# Altium PCB GM802测试板.PcbDoc
Units mil, origin at the board's own origin, x right, y up, seen from the top; angles counter-clockwise.
Board outline 1124 x 2005 mil, 2 copper layers (Top Layer, Bottom Layer); 29 components, 39 nets, 210 pads, 99 vias.
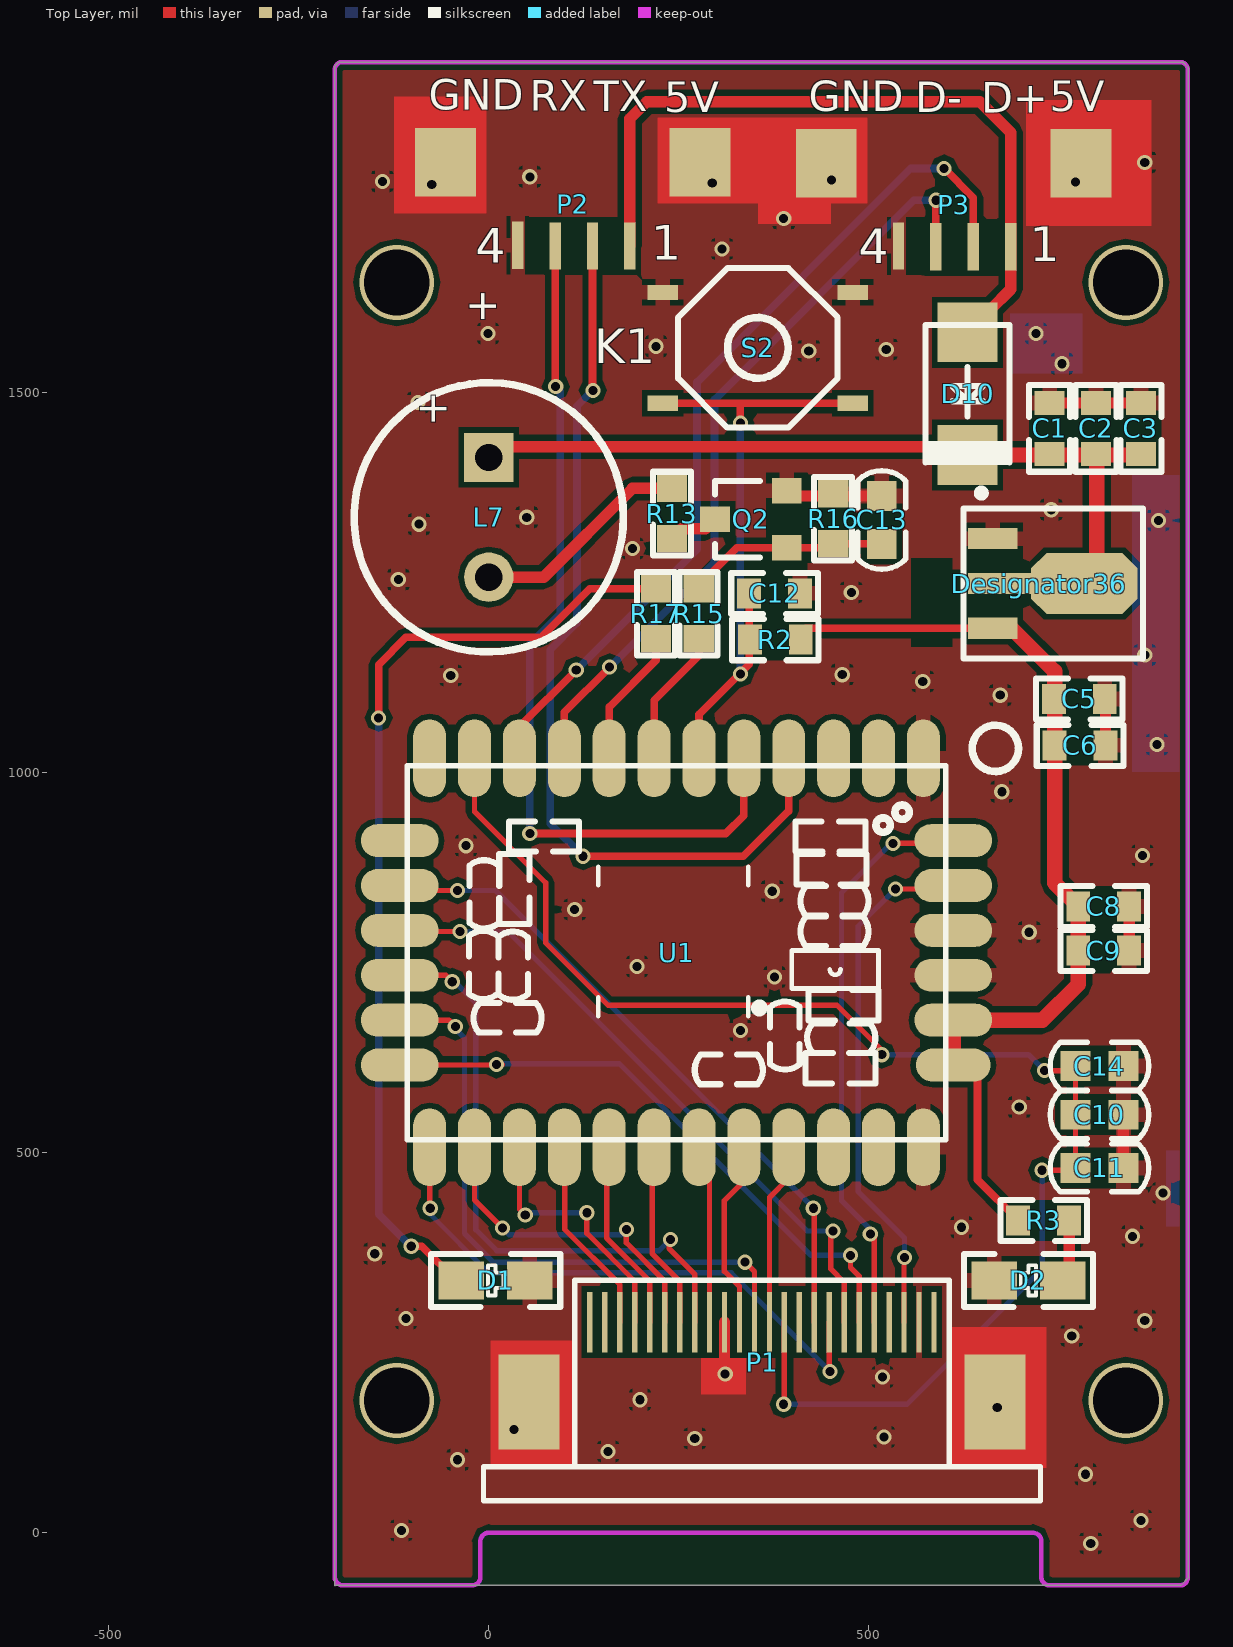
[diagram p0: Top Layer view]
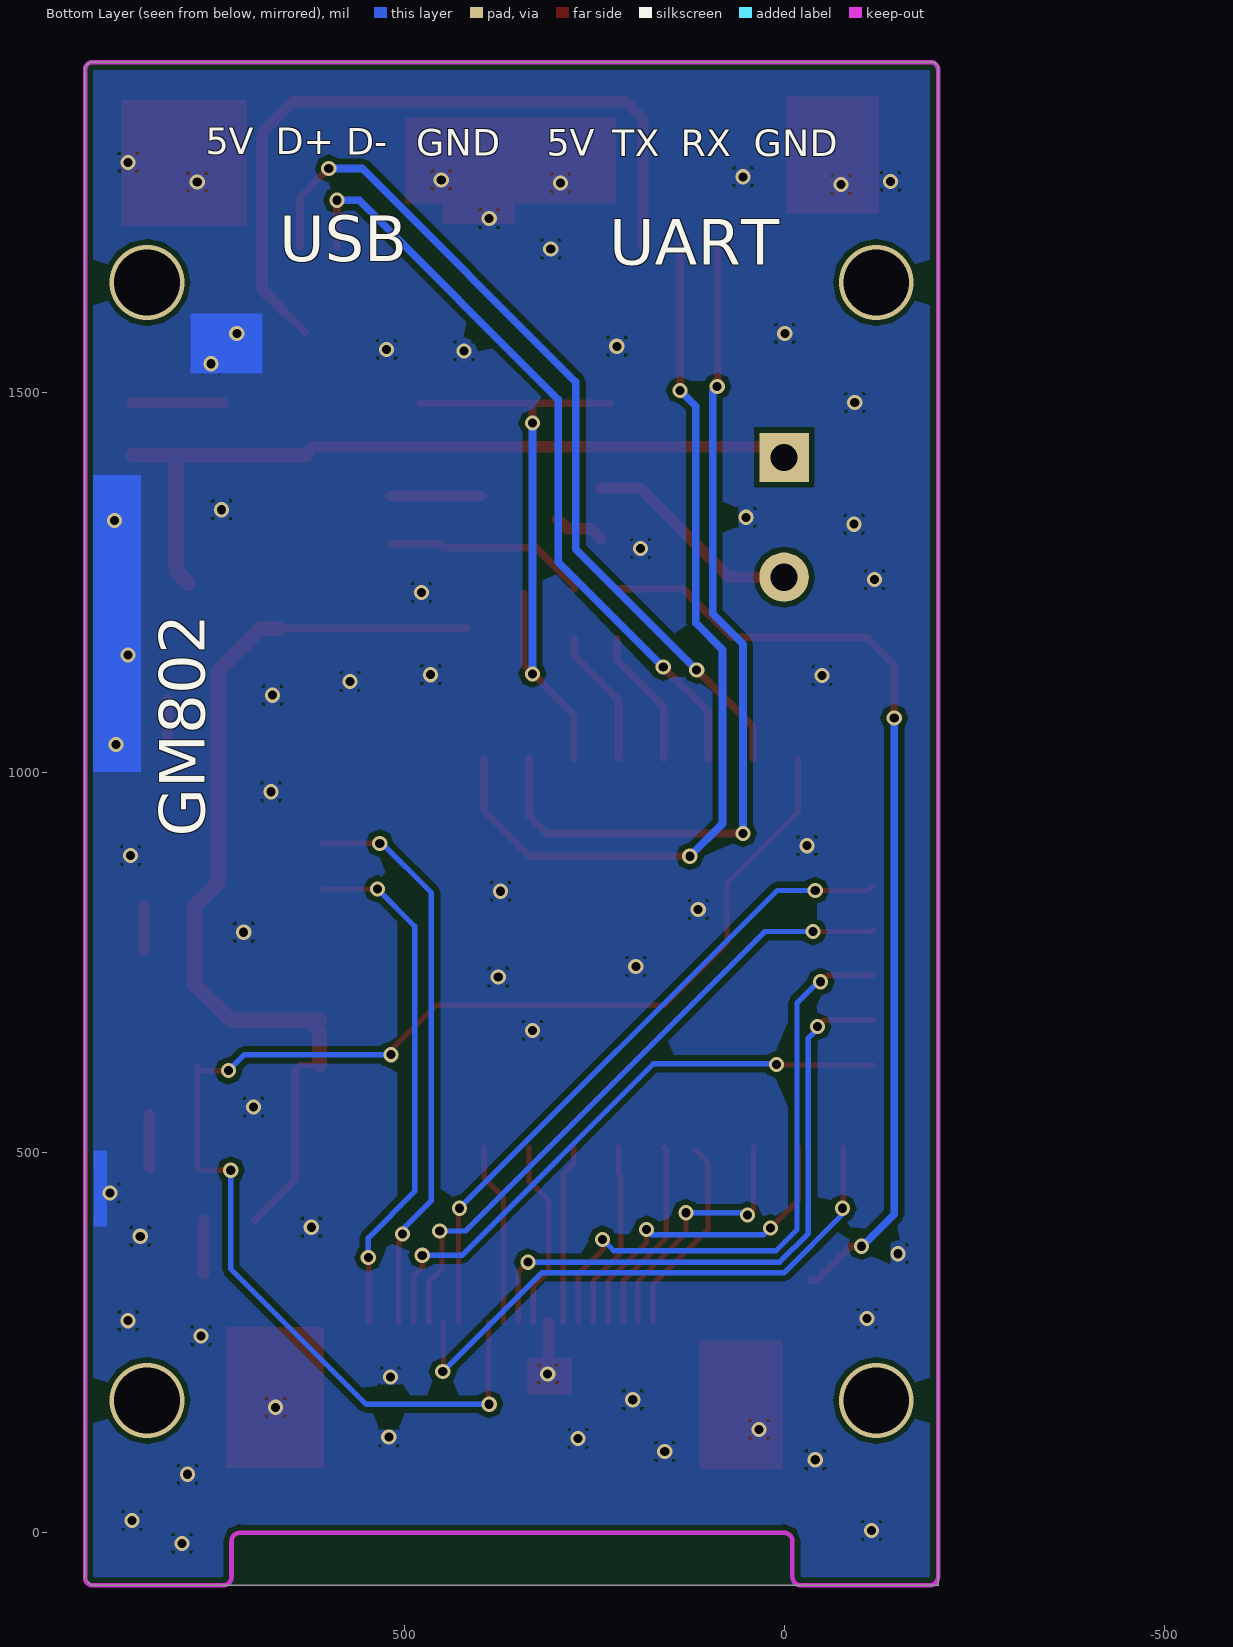
[diagram p1: Bottom Layer view, seen from below]

## Layer stack, top to bottom
Top Layer: signal copper 1.4
Dielectric: dielectric 12.6, FR-4, Dk 4.8
Bottom Layer: signal copper 1.4

## Board outline
-202.69,1914 -202.69,-55 -202.69,-69.69 -203,-70 -202.23,-69.23 -188,-69.23 910.77,-69.23 921,-59 920,-58 920,1915 920,1928 913,1935 -198,1935 -198,1934 -203,1929

## Design rules (kind name [scope] priority, off if disabled: settings)
Clearance [All] p1: gap=7
ComponentClearance [All] p1: gap=0 collisioncheckmode=3 verticalgap=0 showdistances=FALSE
PolygonConnect [All] p1: connectstyle=Relief reliefconductorwidth=20 reliefentries=4 polygonreliefangle="90 Angle"
RoutingVias [All] p1: holewidth=26 width=28 viastyle="Through Hole" minholewidth=15 minwidth=20 maxholewidth=50 maxwidth=50
SilkToSilkClearance [All] p1: silktosilkclearance=0
SilkscreenOverComponentPads [All] p1: minsilkscreentomaskgap=10
SolderMaskExpansion [All] p1: expansion=4
Width [All] p1: maxlimit=50 minlimit=6 preferedwidth=8
25 further rules are at their usual default settings.

## Classes and differential pairs
component class AD402: C2 C5 C6 C8 C10 C11 C12 Q2 R2 R13 R15 R16 S2

## Components (designator, comment, footprint, x,y, rotation, side; value= is the part's Value field where it differs from the comment)
C1 "4.7uF" C0603 738,1453 r270 top
C2 "104" C0603 799,1453 r90 top
C3 "104" C0603 858,1453 r270 top
C5 "4.7uF" C0603 777,1097 r180 top
C6 "104" C0603 778,1036 r180 top
C8 "104" C0603 809,824 r180 top
C9 "4.7uF" C0603 809,766 r180 top
C10 "0.1uF" C_0603 772,550 r0 top
C11 "0.1uF" C_0603 772,480 r0 top
C12 "104" C0603 376,1236 r180 top
C13 "22PF" C_0603 517,1301 r90 top (schematic designator C10)
C14 "2.2uF" C_0603 772,614 r0 top (schematic designator C10)
D1 "LED  蓝灯" "LED 0805" -81,292 r0 top (schematic designator D2)
D2 "红灯" "LED 0805" 800,372 r180 top
D10 "1N5819" DO-214AC 575,1588 r270 top
Designator36 "MD5133" HT7333-A 623,1348 r270 top
L7 "常规直插" "蜂鸣器 -9mm" 0,1336 r270 top
P1 "0.5间距24芯贴片插座" 0.5mm24芯贴片插座 -12,37 r0 top
P2 "城章常规串口线" "1.25间距4芯贴片座 无丝印外框" 46,1666 r0 top
P3 "城章常规USB线" "1.25间距4芯贴片座 无丝印外框" 547,1665 r0 top
Q2 "8050D" sot-23a 342,1333 r90 top
R2 "10K" R0603 377,1175 r0 top
R3 "1K" R0603 730,411 r180 top (schematic designator R1)
R13 "10" 0603 241,1341 r90 top
R15 "1K" 0603 276,1209 r270 top
R16 "10K" 0603 453,1334 r90 top
R17 "1K" 0603 220,1209 r90 top (schematic designator R15)
S2 "SW-PB" 5.2*5.2铜按键 354,1562 r0 top
U1 "Comment" GM802 247,763 r180 top

## Footprints (in the part's own frame and the unit in brackets; to place one, negate y for a bottom-side part, rotate by r counter-clockwise, add the part's x,y. Pads: shape width x height; smd on the part's side, far side on the other; paste and mask are expansions set on the pad)
0.5mm24芯贴片插座 [mil]
  rect 80x125 smd: 0(65,135) 0(678,135)
  rect 7x80 smd: 1(597.76,240) 2(578.07,240) 3(558.39,240) 4(538.7,240) 5(519.02,240) 6(499.33,240) 7(479.65,240) 8(459.96,240) 9(440.28,240) 10(420.59,240) 11(400.91,240) 12(381.22,240) 13(361.54,240) 14(341.85,240) 15(322.17,240) 16(302.48,240) 17(282.8,240) 18(263.11,240) 19(243.43,240) 20(223.74,240) 21(204.06,240) 22(184.37,240) 23(164.68,240) 24(145,240)
  silkscreen extent 5,5 738,295
"1.25间距4芯贴片座 无丝印外框" [mil]
  rect 80x90 smd: 0(-103,137) 0(232,137)
  rect 15x62 smd: 1(-8,27.98) 2(41.21,27) 3(90.43,27) 4(139.64,27)
5.2*5.2铜按键 [mil]
  rect 40x20 smd: 1(-125,-76) 1(125,-76) 2(-125,70) 2(125,70)
  silkscreen extent -105,-108 105,102
0603 [mil]
  rect 36x40 smd: 1(-33,0) 2(33,0)
  silkscreen extent -55,-25 55,25
C0603 [mm]
  rect 0.8x1 smd: 1(-0.85,0) 2(0.85,0)
  silkscreen extent -1.45,-0.69 1.45,0.69
C_0603 [mm]
  rect 1x1 smd: 1(0,0) 2(1.6,0)
  silkscreen extent -0.85,-0.8 2.45,0.8
DO-214AC [mm]
  rect 2x2 smd: 1(0.218,1.397) 2(4.318,1.397)
  silkscreen extent -0.03,-0.01 4.65,2.8
GM802 [mm]
  oval 1.1x2.6 smd: 1(-8.25,-6.5) 2(-6.75,-6.5) 3(-5.25,-6.5) 4(-3.75,-6.5) 5(-2.25,-6.5) 6(-0.75,-6.5) 7(0.75,-6.5) 8(2.25,-6.5) 9(3.75,-6.5) 10(5.25,-6.5) 11(6.75,-6.5) 12(8.25,-6.5) 19(8.25,6.5) 20(6.75,6.5) 21(5.25,6.5) 22(3.75,6.5) 23(2.25,6.5) 24(0.75,6.5) 25(-0.75,6.5) 26(-2.25,6.5) 27(-3.75,6.5) 28(-5.25,6.5) 29(-6.75,6.5) 30(-8.25,6.5)
  rect 0.914x0.914 on Top Overlay: 1(-6.115,0.557) 2(-4.489,0.557)
  rect 0.635x0.508 on Top Overlay: 1(-6.09,3.859) 1(-6.09,2.843) 1(-4.972,1.751) 1(-4.693,-1.729) 1(-4.693,-0.713) 1(-4.566,-2.796) 1(-4.54,-3.888) 1(-1.162,3.91) 1(5.036,-3.888) 1(6.229,2.183) 2(-6.196,1.751) 2(-5.861,-1.729) 2(-5.861,-0.713) 2(-5.79,-2.796) 2(-5.764,-3.888) 2(-4.921,2.843) 2(-4.865,3.859) 2(-2.33,3.91) 2(3.811,-3.888) 2(5.061,2.183)
  rect 0.508x0.635 on Top Overlay: 1(-3.626,3.351) 1(5.417,-2.745) 1(5.467,-0.154) 1(6.433,-2.542) 1(6.458,-0.179) 2(-3.626,2.183) 2(5.417,-1.521) 2(5.467,1.014) 2(6.433,-1.373) 2(6.458,0.989)
  oval 0.7x0.18 on Top Overlay: 1(-2.292,1.192) 2(-2.292,0.842) 3(-2.292,0.492) 4(-2.292,0.142) 5(-2.292,-0.208) 6(-2.292,-0.558) 7(-2.292,-0.908) 8(-2.292,-1.258) 9(-2.292,-1.608) 10(-2.292,-1.958) 25(2.508,-1.958) 26(2.508,-1.608) 27(2.508,-1.258) 28(2.508,-0.908) 29(2.508,-0.558) 30(2.508,-0.208) 31(2.508,0.142) 32(2.508,0.492) 33(2.508,0.842) 34(2.508,1.192)
  oval 0.18x0.7 on Top Overlay: 11(-2.167,-2.783) 12(-1.817,-2.783) 13(-1.467,-2.783) 14(-1.117,-2.783) 15(-0.767,-2.783) 16(-0.417,-2.783) 17(-0.067,-2.783) 18(0.283,-2.783) 19(0.633,-2.783) 20(0.983,-2.783) 21(1.333,-2.783) 22(1.683,-2.783) 23(2.033,-2.783) 24(2.383,-2.783) 35(2.383,2.017) 36(2.033,2.017) 37(1.683,2.017) 38(1.333,2.017) 39(0.983,2.017) 40(0.633,2.017) 41(0.283,2.017) 42(-0.067,2.017) 43(-0.417,2.017) 44(-0.767,2.017) 45(-1.117,2.017) 46(-1.467,2.017) 47(-1.817,2.017) 48(-2.167,2.017)
  oval 2.6x1.1 smd: 13(9.25,-3.75) 14(9.25,-2.25) 15(9.25,-0.75) 16(9.25,0.75) 17(9.25,2.25) 18(9.25,3.75) 32(-9.25,2.25) 33(-9.25,0.75) 34(-9.25,-0.75) 35(-9.25,-2.25) 36(-9.25,-3.75)
  oval 2.5x1.1 smd: 31(-9.25,3.75)
  rrect10% 3.5x3.5 on Top Overlay: 49(0.108,-0.383)
  silkscreen extent -9,-6.25 9,6.25, body extent -6.09,-4.14 6.71,4.16, height 0.6
HT7333-A [mil]
  rect 28x65 smd: 1(158.11,40) 2(40,40)
  oct 80x140 smd: 3(99.06,160.63)
  rect 28x85 smd: 3(99.06,49.86)
  silkscreen extent -25,2 197,238
"LED 0805" [mil]
  rect 60x50 smd: 1(45,40) 2(135,40)
  silkscreen extent 5,5 175,75
R0603 [mm]
  rect 0.8x1 smd: 1(-0.85,0) 2(0.85,0)
  silkscreen extent -1.45,-0.69 1.45,0.69
sot-23a [mm]
  rect 0.85x1 smd: 1(0.01,1.13) 2(-0.94,-1.27) 3(0.96,-1.27)
  silkscreen extent -1.26,-0.37 1.29,1.13
"蜂鸣器 -9mm" [mil]
  rect 65x65 hole 36: 1(-78.74,0)
  round 65 hole 36: 2(78.74,0)
  silkscreen extent -177,-177 177,177

## Part data
C10 C11 C13 C14: library part CAP, "Capacitor"
Q2: "NPN Bipolar Transistor"
R13 R15 R16 R17: library part 电?

## Via types
v1: diameter 20, hole 12, Top Layer to Bottom Layer, 95 vias
v2: diameter 98.43, hole 86.61, Top Layer to Bottom Layer, 4 vias

## Nets (pads, with @x,y where several pads share a name; then routed paths per layer and width w, separated by ;. In a path a pad name is that pad's centre, name@x,y a point inside that pad or via, vN(x,y) a via of type N, cw(c..) or ccw(c..) an arc to the next point about the centre after c; other vN are vias at no path point)
5V: C1.2 C2.1 C3.2 D10.2 Designator36.3 L7.1 | length 1042.8
  Top Layer w15: L7.1 14.26,1429 619,1429 D10.2
  Top Layer w20: D10.2 C2.1@800,1418 ; Designator36.3@783.63,1248.94 800,1265.32 C2.1@800,1418 ; C3.2@856.46,1418 C2.1@800,1418
5V_1: D10.1 P2.4 P3.4 | length 981.1
  Top Layer w10: D10.1 D10.1@659.29,1608.71
  Top Layer w15: P2.4 185.64,1860.64 208,1883 646,1883 686.64,1842.36 P3.4 686.64,1636.05 D10.1@659.29,1608.71
AVDD2.8V: C10.1 C11.1 C14.1 P1.11 U1.11@-18.75,1018.91 | length 1879.4
  Top Layer w7: U1.11@-18.75,1018.91 -18.75,948.75 75,855 75,776 157,694 458,694 v1@521,631 ; v1(388,169) 388.91,169.91 P1.11 ; v1(728,477) C11.1@769,477 ; v1(731,608) 770,608 C14.1@772,606 ; C11.1 C10.1 C14.1@772,606 ; C14.1 C14.1@772,606
  Bottom Layer w7: v1(388,169) 550,169 728,347 v1(728,477) ; v1(517,629) 710,629 v1(731,608)
BEEP: R15.2 U1.7@217.47,1018.91 | length 181.3
  Top Layer w10: U1.7@217.47,1018.91 217.47,1095.47 276,1154 R15.2
GND: C1.1 C2.2 C3.1 C5.1 C6.1 C8.1 C9.1 C10.2 C11.2 C12.1 C13.2 C14.2 D1.2 D2.2 Designator36.2 P1.0 P1.2 P1.15 P2.0 P2.1 P3.0 P3.1 Q2.3 R16.2 S2.2 U1.1@571.8,1018.91 U1.30@571.8,507.09 U1.33@611.17,733.47 U1.34@611.17,792.53 | length 495
  Top Layer w15: v1@310.17,208.17 P1.15 ; Q2.3@398.8,1363.99 C13.2 ; C1.1 C2.2 C3.1 ; C6.1 C5.1@811.46,1096 ; C11.2 C10.2 ; C9.1 C8.1
  other v1: 792,-14 -115,3 858,16 785,77 -41,96 157,107 271,124 520,126 33,136 669,165 199,175 518,205 311,209 767,259 863,279 -109,282 -150,367 847,390 622,402 887,447 698,560 331,661 376,731 195,745 711,790 113,820 373,844 860,891 -30,904 675,975 879,1037 673,1102 571,1120 -50,1128 465,1129 863,1155 477,1237 -119,1254 189,1295 -92,1327 881,1332 50,1336 740,1346 -93,1487 754,1538 421,1555 523,1557 220,1561 -1,1578 720,1578 307,1689 388,1729 -75,1774 294,1776 772,1777 -140,1778 451,1780 54,1784 863,1803
GPIO1: R17.1 U1.8@158.42,1018.91 | length 182.6
  Top Layer w10: U1.8@158.42,1018.91 158.42,1086.42 220,1148 R17.1
LED1: U1.2@512.75,1018.91
LED2: 
LED3: U1.3@453.69,1018.91
LED4: 
NetD1_2: D2.1 R3.1 | length 70.5
  Top Layer w15: D2.1@763.46,340.46 R3.1
NetD1_3: 
NetD1_4: D1.1 R17.2 | length 1274.9
  Top Layer w10: v1(-145,1072) -145,1142 -109,1178 69,1178 133,1242 R17.2 ; v1(-102,377) -88,377 -43,332 D1.1
  Bottom Layer w10: v1(-145,1072) -145,419 v1@-102,376
NetLS1_2: L7.2 R13.2 | length 289.4
  Top Layer w15: L7.2 72.26,1257.26 189,1374 R13.2
NetQ2_1: Q2.1 R13.1 | length 67
  Top Layer w15: R13.1 254,1321 285.12,1321 Q2.1
NetQ2_2: C13.1 Q2.2 R15.1 R16.1 | length 267.8
  Top Layer w10: R15.1 276,1246 325.99,1295.99 Q2.2 447.99,1295.99 R16.1 C13.1
OUT1: U1.28@453.69,507.09
S_D0: P1.19 U1.20@-18.75,507.09 | length 433.8
  Top Layer w7: U1.20@-18.75,507.09 -18.75,437.75 v1(18,401) ; v1(181,399) 181,381.6 231.43,331.17 P1.19
  Bottom Layer w7: v1(18,401) 27,392 174,392 v1(181,399)
S_D1: P1.21 U1.21@40.31,507.09 | length 344.6
  Top Layer w7: U1.21@40.31,507.09 40.31,425.69 v1(48,418) ; v1(129,421) 129,394 192.06,330.94 P1.21
  Bottom Layer w7: v1(48,418) 51,421 v1(129,421)
S_D2: P1.22 U1.22@99.36,507.09 | length 264.3
  Top Layer w7: U1.22@117.36,504.09 100,486.73 100,399 172.37,326.63 P1.22
S_D3: P1.20 U1.23@158.42,507.09 | length 255
  Top Layer w7: U1.23@158.42,507.09 155,503.68 155,387.8 211.74,331.06 P1.20
S_D4: P1.18 U1.24@217.47,507.09 | length 246.1
  Top Layer w7: U1.24@217.47,507.09 217.47,472 215,469.53 215,367.4 251.11,331.29 P1.18
S_D5: P1.16 U1.25@276.53,507.09 | length 235.9
  Top Layer w7: U1.25@276.53,507.09 276.53,486.47 290.48,472.52 P1.16
S_D6: P1.14 U1.26@335.58,507.09 | length 248.9
  Top Layer w7: P1.14 329.85,324.15 310,344 310,437 335.58,462.58 U1.26@335.58,507.09
S_D7: P1.12 U1.27@394.64,507.09 | length 240.6
  Top Layer w7: P1.12 369.22,441.22 394.64,466.64 U1.27@394.64,507.09
S_HSYNC: P1.9 U1.14@-117.17,851.58 | length 870
  Top Layer w7: U1.14@-117.17,851.58 -110.59,845 v1(-41,845) ; P1.9 v1@428.28,427
  Bottom Layer w7: v1(-41,845) 9,845 v1(427,427)
S_MCLK: P1.13 U1.17@-117.17,674.42 | length 819.7
  Top Layer w7: U1.17@-117.17,674.42 -52.42,674.42 v1(-44,666) ; v1(337,356) 349.54,343.46 P1.13
  Bottom Layer w7: v1@-44,663 -32,651 -32,393.8 5.8,356 v1(337,356)
S_PCLK: P1.17 U1.16@-117.17,733.47 | length 811.6
  Top Layer w7: U1.16@-117.17,733.47 -56.47,733.47 v1(-48,725) ; v1@237,386 237,374 270.8,340.2 P1.17
  Bottom Layer w7: v1@-48,728 -17,697 -17,398.6 10.6,371 224,371 v1(239,386)
S_PWDN: P1.8 U1.19@-77.8,507.09 | length 759.2
  Top Layer w7: U1.19@-77.8,507.09 -77.8,427.8 v1(-77,427) ; v1@447.96,217.96 P1.8
  Bottom Layer w7: v1(-77,427) -77,419 0,342 319,342 v1(449,212)
S_RESET: P1.6 U1.18@-117.17,615.36 | length 789.5
  Top Layer w7: U1.18@-117.17,615.36 17.36,615.36 v1@18,616 ; v1(476,365) 476,349 487.33,337.67 P1.6
  Bottom Layer w7: v1@19,617 172,617 424,365 v1(476,365)
  other v1: 10,616
S_SCL: P1.5 U1.36@611.17,910.64 | length 750.9
  Top Layer w7: P1.5 507.02,389.02 v1@508,390 ; v1(532,907) U1.36@607.54,907
  Bottom Layer w7: v1@508,393 464,437 464,842 v1@531,909
  other v1: 502,393
S_SDA: P1.3 U1.35@611.17,851.58 | length 676.8
  Top Layer w7: v1(535,847) U1.35@606.59,847 ; P1.3 546.39,351.61
  Bottom Layer w7: v1(535,847) 486,798 486,449 547,388 v1(547,362)
S_VSYNC: P1.7 U1.15@-117.17,792.53 | length 861.3
  Top Layer w7: U1.15@-117.17,792.53 -115.65,791 v1(-38,791) ; v1@450,397 450,347 467.65,329.35 P1.7
  Bottom Layer w7: v1(-38,791) 25,791 419,397 v1(453,397)
TRIG: C12.2 R2.1 S2.1 U1.6@276.53,1018.91 | length 848.4
  Top Layer w10: S2.1@229,1486 S2.1@479,1486 ; U1.6@276.53,1018.91 276.53,1076.53 342.54,1142.54 C12.2 ; v1(331,1460) 331,1484
  Bottom Layer w10: v1(331,1130) v1(331,1460)
UART_RD: P2.2 U1.5@335.58,1018.91 | length 1159.5
  Top Layer w10: v1(54,920) 312,920 335.58,943.58 U1.5@335.58,1018.91 ; v1@87.21,1507.21 P2.2
  Bottom Layer w10: v1(54,920) 54,1169 94,1209 94,1502 v1(88,1508)
UART_TD: P2.3 U1.4@394.64,1018.91 | length 1208.9
  Top Layer w10: v1(124,890) 335,890 394.64,949.64 U1.4@394.64,1018.91 ; P2.3 136.43,1503.57 v1(137,1503)
  Bottom Layer w10: v1(124,890) 81,933 81,1162 116,1197 116,1482 v1(137,1503)
USB_D+: P3.3 U1.10@40.31,1018.91 | length 1152.2
  Top Layer w10: U1.10@40.31,1018.91 40.31,1060.31 v1(115,1135) ; v1(599,1795) 637.43,1756.57 P3.3
  Bottom Layer w10: v1(115,1135) 274,1294 274,1514 555,1795 v1(599,1795)
USB_D-: P3.2 U1.9@99.36,1018.91 | length 1015
  Top Layer w10: U1.9@99.36,1018.91 99.36,1079.36 v1(159,1139) ; P3.2 v1(588.21,1753.21)
  Bottom Layer w10: v1(159,1139) 297,1277 297,1491 559.21,1753.21 v1(588.21,1753.21)
V3.3: C5.2 C6.2 C8.2 C9.2 Designator36.1 R2.2 R3.2 U1.31@611.17,615.36 U1.32@611.17,674.42 | length 1279.4
  Top Layer w8: U1.31@611.17,615.36 636.64,615.36 U1.31@643,609
  Top Layer w10: R2.2@417,1189.89 Designator36.1 ; U1.31@643,609 643,464.54 R3.2
  Top Layer w20: U1.31@611.17,615.36 611.17,659.59 U1.32@626,674.42 ; U1.32@611.17,674.42 U1.32@626,674.42 ; Designator36.1 688.11,1189.89 744.54,1133.46 C6.2 744.54,855 C8.2 C9.2 775.54,721.54 728.42,674.42 U1.32@626,674.42
pads on no net: P1.1 P1.4 P1.10 P1.23 P1.24 U1.1@1.75,677.06 U1.1@31.75,769.06 U1.1@33.75,871.06 U1.1@48.75,916.06 U1.1@292.75,609.06 U1.1@337.24,716.05 U1.1@389.75,631.06 U1.1@425.75,916.06 U1.1@426.75,873.06 U1.1@431.75,791.06 U1.1@431.75,831.06 U1.1@442.75,694.06 U1.1@486.75,611.06 U1.1@486.75,651.06 U1.1@487.75,741.06 U1.1@-6.25,863.06 U1.1@-7.25,770.06 U1.2@31.75,723.06 U1.2@33.75,822.86 U1.2@47.75,677.06 U1.2@96.95,916.06 U1.2@337.24,729.83 U1.2@338.75,609.06 U1.2@389.75,677.06 U1.2@423.75,741.06 U1.2@438.55,611.06 U1.2@440.75,651.06 U1.2@473.95,916.06 U1.2@474.95,873.06 U1.2@477.75,791.06 U1.2@477.75,831.06 U1.2@490.95,694.06 U1.2@-6.25,817.06 U1.2@-7.25,724.06 U1.3@337.24,743.61 U1.4@337.24,757.39 U1.5@337.24,771.17 U1.6@337.24,784.95 U1.7@337.24,798.73 U1.8@337.24,812.51 U1.9@337.24,826.29 U1.10@337.24,840.07 U1.11@332.32,872.55 U1.12 U1.13 U1.14@290.98,872.55 U1.15@277.2,872.55 U1.16@263.42,872.55 U1.17@249.64,872.55 U1.18@235.86,872.55 U1.19@222.08,872.55 U1.20@208.3,872.55 U1.21@194.52,872.55 U1.22@180.74,872.55 U1.23@166.96,872.55 U1.24@153.18,872.55 U1.25@148.26,840.07 U1.26@148.26,826.29 U1.27@148.26,812.51 U1.28@148.26,798.73 U1.29 U1.30@148.26,771.17 U1.31@148.26,757.39 U1.32@148.26,743.61 U1.33@148.26,729.83 U1.34@148.26,716.05 U1.35@153.18,683.57 U1.36@166.96,683.57 U1.37 U1.38 U1.39 U1.40 U1.41 U1.42 U1.43 U1.44 U1.45 U1.46 U1.47 U1.48 U1.49
copper on no net:
  other v2: -121.2,174 838.17,174 -121.2,1644.98 838.17,1645

## Polygon pours and split planes (outlines as drawn)
GND on Bottom Layer "Bottom Layer-No Net" (solid, remove dead copper, pour order 4): -245.08,1941.99 904.45,1941.99 937.12,1941.99 939.2,1944 983,1901.86 983,-96 -442.49,-96 -455,-83.96
GND on Top Layer "Bottom Layer-No Net" (solid, remove dead copper, pour order 3): -607.75,2038.61 883.12,2038.61 925.49,2038.61 928.2,2041 985,1990.88 985,-385 -863.77,-385 -880,-370.68

## Keep-outs
Keep-Out Layer:
  lines w6: -202.73,-58.97 ccw(c-191.08,-57.61) -192.69,-69.23 -23.23,-69.23 ccw(c-22.11,-58.11) -11,-59.23 -11,-11 ; -202.69,-58.97 -202.69,1925 cw(c-192.69,1925) -192.69,1935 909.67,1935 cw(c909.67,1925) 919.67,1925 919.67,-57.91 919.67,-59.23 cw(c909.67,-59.23) 909.67,-69.23 737,-69.23 cw(c738.11,-58.11) 727,-57 727,-12 ; -11,-12 cw(c0.14,-11.17) 1.25,-0.06 ; 0,0 715,0 cw(c715.83,-11.14) 726.94,-12.25

## Other copper
Top Layer:
  rectangle net GND: 2,84 111,253
  rectangle net GND: 605,85 734,271
  rectangle net GND: -125,1736 -3,1890
  rectangle net GND: 354,1722 450,1775
  rectangle net GND: 222,1749 498,1862
  rectangle net GND: 707,1719 872,1885
  rectangle net GND: 279,182 338.7,230
  pour cut-out: 426,1342 490.31,1342 490.31,1313.99 480,1324.3 480,1326 433.07,1326 431.39,1327.68
  pour cut-out: 718,364 702,364 702,300 718,300
  pour cut-out: 214,1349 214,1333 259.3,1333 264.87,1338.57 264.87,1347.89 263.76,1349
  pour cut-out: 303,1217 303,1201 193,1201 193,1217
  pour cut-out: 702.5,1287 702.5,1276.57 706.63,1272.44 704.13,1269.94 623.36,1269.94 623.36,1286.86 623.5,1287
  pour cut-out: 706.63,1227.94 702.5,1223.82 702.5,1210.89 623.5,1210.89 623.36,1211.03 623.36,1230.54
  pour cut-out: 17,364 1,364 1,300 17,300
  pour cut-out: 387.4,1148 363,1148 363,1254 360,1257 368,1265 390,1265 390,1150.6
  pour cut-out: 719.28,437.68 740.72,437.68 740.72,384.31 719.28,384.31
  pour cut-out: 819.72,850.68 798.28,850.68 798.28,736.4 816.8,736.4 820.4,740 826,740
  pour cut-out: 787.72,1123.68 766.28,1123.68 766.28,1010.31 767.28,1009.31 767.97,1010 795,1010
  pour cut-out: 365.32,1347.06 365.32,1319.72 426,1319.72 426,1342 421,1347 421,1351 369.25,1351
  pour cut-out: 711.31,1463.72 711.31,1442.28 884.69,1442.28 884.69,1463.72
  pour cut-out: 575.25,324 570,324 570,230 575.25,230
  pour cut-out: 562,230 556.89,230 556,252 556.89,274.91 554.49,300 557.75,324 562,324
  pour cut-out: 314.93,230 319.35,230 319.08,230.01 324,261 319.08,293.01 314.93,299.9 314.93,291.86
  pour cut-out: 300.93,230 305.07,230 305.08,230.01 305.08,293.01 300.93,299.9 300.93,291.86
  pour cut-out: 672.14,1654 651.93,1654 651.93,1725.43 654.99,1728.49 659.32,1728.49 670.94,1716.86
  pour cut-out: 622.93,1730 602.71,1730 602.71,1654 622.93,1654
  pour cut-out: 573.71,1730 572.73,1730.98 553.5,1730.98 553.5,1654.98 565.98,1654.98 573.71,1654 573.71,1662.71
  pour cut-out: 171.14,1731 150.93,1731 150.93,1655 171.14,1655
  pour cut-out: 121.93,1731 101.71,1731 101.71,1655 121.93,1655
  pour cut-out: 52.5,1655.98 72.71,1655.98 72.71,1731 53.48,1731 52.5,1731.98
  pour cut-out: -514.51,321 -530.51,321 -532.51,323 -532.51,398 -507.51,398 -506.51,397
Bottom Layer:
  rectangle net GND: 846,1001 909,1392
  rectangle net GND: 891,403.01 908.85,503
  rectangle net GND: 686,1525 781,1604

## Silkscreen, mask and mechanical layers (free items; w line width, h text height)
Top Overlay:
  circle w10: c666.54,1032 r30.46
  text "USB" at 598.49,2002 h45
  text "UART" at -13,1991 h45
  text "GND" at -79,1872 h40
  text "RX" at 54,1871 h40
  text "TX" at 138,1870 h40
  text "GND" at 421,1870 h40
  text "5V" at 738,1870 h40
  text "5V" at 231,1869 h40
  text "D-" at 561,1869 h40
  text "D+" at 648,1868 h40
  text "1" at 214,1675 h45
  text "1" at 712,1673 h45
  text "4" at -17,1671 h45
  text "4" at 487,1670 h45
  text "K1" at 139,1539 h45
Bottom Overlay:
  text "D+" at 669,1814 h35
  text "5V" at 761,1814 h35
  text "D-" at 576,1813 h35
  text "5V" at 312,1812 h35
  text "GND" at 484,1812 h35
  text "GND" at 40,1811 h35
  text "RX" at 136,1811 h35
  text "TX" at 226,1811 h35
  text "USB" at 664,1673 h60
  text "UART" at 230,1668 h60
  text "GM802" at 762,916 h60 r270

## Text inside footprints (layer, text, board x,y; h text height)
L7: Top Overlay "+" at -25,1590.61 h40 r270; Top Overlay "+" at -90,1455.61 h40 r270